# Altium PCB WCH_hairDrierCore_V1.5.PcbDoc (part 5 of 7)
Units mil, origin at the board's own origin, x right, y up, seen from the top; angles counter-clockwise.
Board outline 1683.54 x 992.13 mil, 4 copper layers (Top Layer, Mid-Layer 1, Mid-Layer 2, Bottom Layer); 84 components, 65 nets, 249 pads, 160 vias.
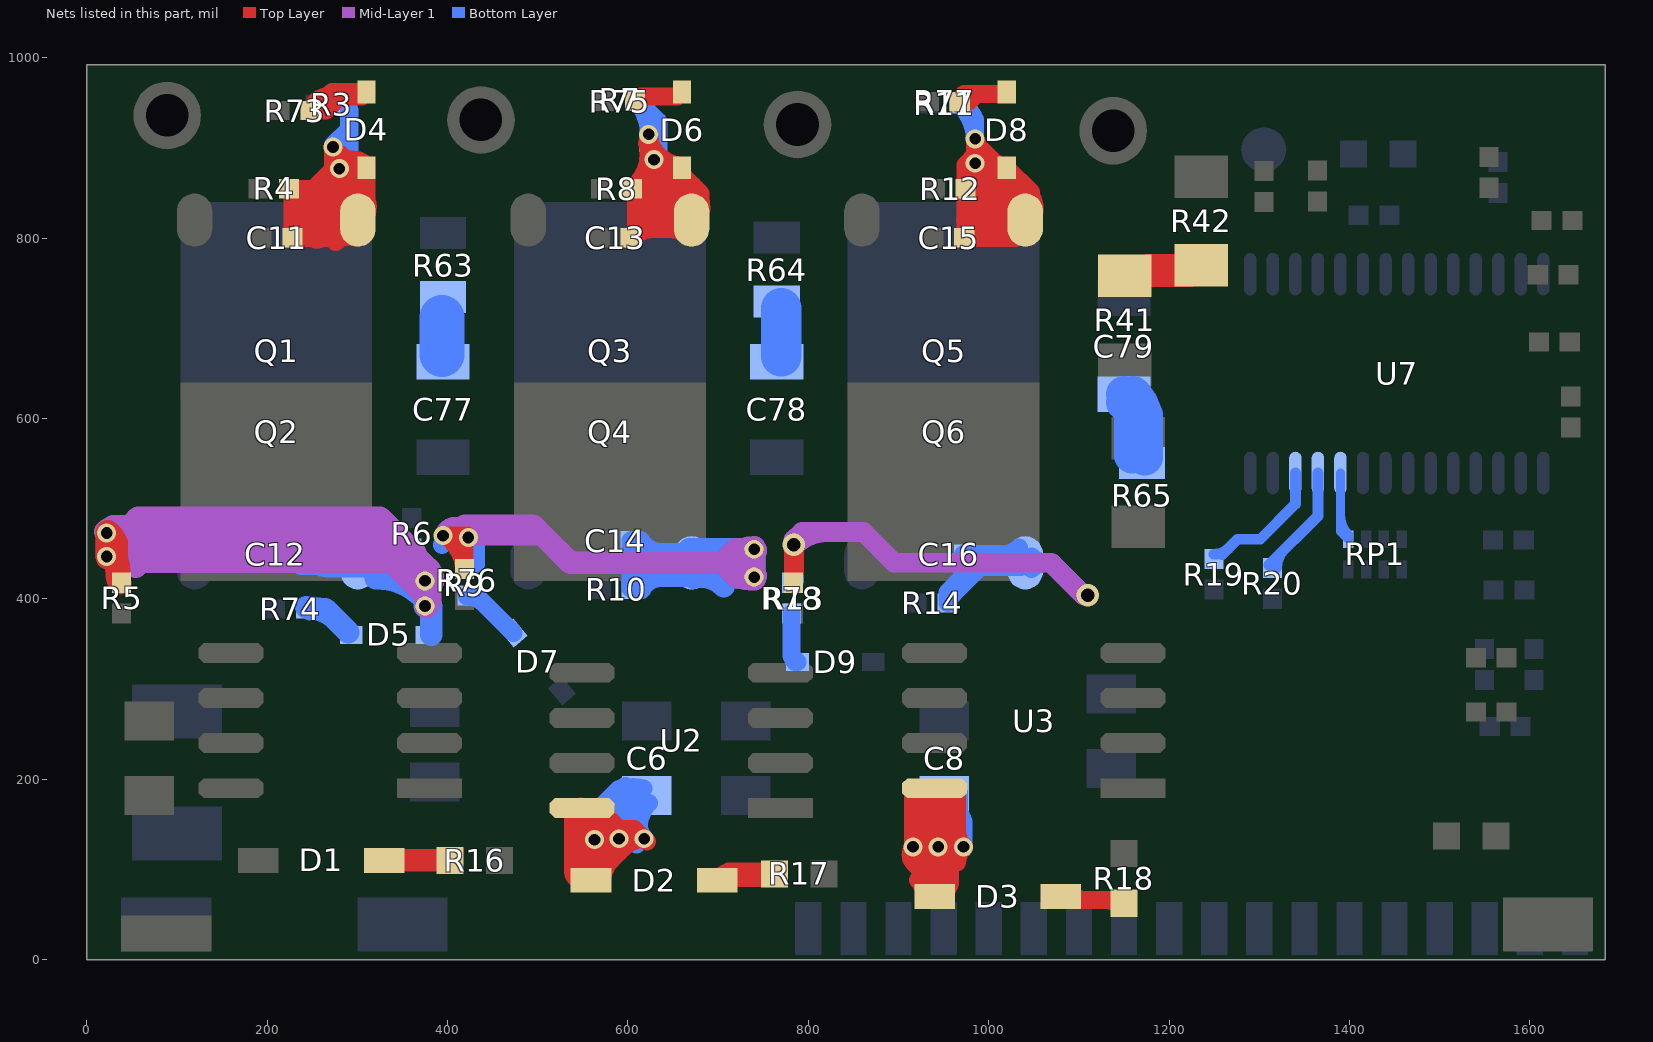
[diagram p7: the nets of this part, all layers, seen from the top]

## Via types
v1: diameter 21, hole 13, Top Layer to Bottom Layer, tented both sides, 155 vias
v2: diameter 25, hole 15, Top Layer to Bottom Layer, tented both sides, 5 vias

## Nets (pads, with @x,y where several pads share a name; then routed paths per layer and width w, separated by ;. In a path a pad name is that pad's centre, name@x,y a point inside that pad or via, vN(x,y) a via of type N, cw(c..) or ccw(c..) an arc to the next point about the centre after c; other vN are vias at no path point) (continued)
NetC6_1: C6.1 D2.2 U2.8 | length 3574.9
  Top Layer w20: v1@558,134 575,134 ; D2.2@559,88 575,104 ; v1@612.5,139.5 v1@610.5,139.5 ; U2.8@547.3,169.7 cw(c510.59,133) v1@562.5,133 ; U2.8@547.3,169.7 cw(c510.59,133) v1@562.5,133 ; U2.8@547.3,169.7 cw(c510.59,133) v1@562.5,133 ; v1@562.65,132.65 cw(c532.82,102.82) 575,102.82 ; v1@562.65,132.65 cw(c532.82,102.82) 575,102.82 ; v1@562.65,132.65 cw(c532.82,102.82) 575,102.82 ; D2.2@565.05,90.67 ccw(c541.02,114.7) 575,114.7 ; D2.2@565.05,90.67 ccw(c541.02,114.7) 575,114.7 ; D2.2@565.05,90.67 ccw(c541.02,114.7) 575,114.7 ; D2.2@566.38,91.54 ccw(c561.68,104) 575,104 ; D2.2@566.38,91.54 ccw(c561.68,104) 575,104 ; D2.2@566.38,91.54 ccw(c561.68,104) 575,104 ; D2.2@571.33,89.12 cw(c585.47,93.52) 575,104 ; D2.2@571.33,89.12 cw(c585.47,93.52) 575,104 ; D2.2@571.33,89.12 cw(c585.47,93.52) 575,104 ; D2.2@571.33,89.12 cw(c585.47,93.52) 575,104 ; D2.2@571.33,89.12 cw(c585.47,93.52) 575,104 ; D2.2@571.33,89.12 cw(c585.47,93.52) 575,104 ; D2.2@571.5,88 cw(c601.68,88) 580.34,109.34 ; D2.2@571.5,88 cw(c601.68,88) 580.34,109.34 ; D2.2@571.5,88 cw(c601.68,88) 580.34,109.34 ; D2.2@575,100.46 cw(c618.54,100.46) v1@590.32,133.62 ; D2.2@575,100.46 cw(c618.54,100.46) v1@590.32,133.62 ; D2.2@575,100.46 cw(c618.54,100.46) v1@590.32,133.62 ; 575,104 590,119 ; 575,104 575,134 ; 575,134 575,142 U2.8@549,168 567,168 590,145 ; 575,134 v1(590,134) ; U2.8@575,168 ccw(c594.31,168) 580.66,154.34 ; U2.8@575,168 ccw(c594.31,168) 580.66,154.34 ; U2.8@575,168 ccw(c594.31,168) 580.66,154.34 ; 577.2,139.8 ccw(c590,152.61) v1@590,134.5 ; 577.2,139.8 ccw(c590,152.61) v1@590,134.5 ; 577.2,139.8 ccw(c590,152.61) v1@590,134.5 ; 578.5,138.5 ccw(c588.38,148.38) v1@589.94,134.5 ; 578.5,138.5 ccw(c588.38,148.38) v1@589.94,134.5 ; 578.5,138.5 ccw(c588.38,148.38) v1@589.94,134.5 ; 581.37,153.63 cw(c561.74,134) v1@589.5,134 ; 581.37,153.63 cw(c561.74,134) v1@589.5,134 ; 581.37,153.63 cw(c561.74,134) v1@589.5,134 ; 582.5,111.5 ccw(c564.6,129.4) v1@589.51,133.91 ; 582.5,111.5 ccw(c564.6,129.4) v1@589.51,133.91 ; 582.5,111.5 ccw(c564.6,129.4) v1@589.51,133.91 ; 590,119 v1@610.5,139.5 ; 590,119 v1(590,134) ; v1(590,134) v1(618,134) 607,145 ; v1(590,134) 590,145 ; 590,145 607,145 ; v1@590.15,134.48 ccw(c596.17,153.83) v1@610.5,139.5 ; v1@590.15,134.48 ccw(c596.17,153.83) v1@610.5,139.5 ; v1@590.15,134.48 ccw(c596.17,153.83) v1@610.5,139.5 ; 590.24,145 cw(c590.24,106.24) v1@617.65,133.65 ; 590.24,145 cw(c590.24,106.24) v1@617.65,133.65 ; 590.24,145 cw(c590.24,106.24) v1@617.65,133.65 ; v1@590.29,133.59 cw(c604.11,114.11) v1@621,131 ; v1@590.29,133.59 cw(c604.11,114.11) v1@621,131 ; v1@590.29,133.59 cw(c604.11,114.11) v1@621,131 ; v1@590.46,133.81 cw(c607,127.19) 607,145 ; v1@590.46,133.81 cw(c607,127.19) 607,145 ; v1@590.46,133.81 cw(c607,127.19) 607,145 ; 594.95,123.95 cw(c618,100.91) v1@618,133.5 ; 594.95,123.95 cw(c618,100.91) v1@618,133.5 ; 594.95,123.95 cw(c618,100.91) v1@618,133.5
  Top Layer w40: D2.2@549,98 549,125 U2.8@549,157 ; 549,122.14 cw(c573.86,122.14) v1@556.28,139.72 ; 549,122.14 cw(c573.86,122.14) v1@556.28,139.72 ; 549,122.14 cw(c573.86,122.14) v1@556.28,139.72 ; 549,122.14 cw(c573.86,122.14) v1@556.28,139.72 ; 549,122.14 cw(c573.86,122.14) v1@556.28,139.72 ; 549,122.14 cw(c573.86,122.14) v1@556.28,139.72 ; 549,122.14 cw(c573.86,122.14) v1@556.28,139.72 ; 549,122.14 cw(c573.86,122.14) v1@556.28,139.72 ; 549,122.14 cw(c573.86,122.14) v1@556.28,139.72 ; 549,143.86 ccw(c573.86,143.86) v1@556.28,126.28 ; 549,143.86 ccw(c573.86,143.86) v1@556.28,126.28 ; 549,143.86 ccw(c573.86,143.86) v1@556.28,126.28
  Bottom Layer w20: v1(563,133) 564,134 v1(590,134) ; 574,144 574,173 ; 581.71,180.71 cw(c607.04,155.38) C6.1@617.21,189.73 ; v1@589.5,128.13 cw(c635.16,128.13) C6.1@618.97,170.83 ; 589.5,157.1 cw(c624.18,157.1) C6.1@611.88,189.53 ; 589.5,169 589.5,159.5 ; 589.63,159.63 cw(c614.84,134.41) C6.1@614.84,170.07 ; 590,189 574,173 ; v1@597,136.35 cw(c635,136.35) C6.1@619.57,171.07 ; C6.1@597,167.12 cw(c621.33,167.12) C6.1@611.45,189.35 ; C6.1@597.15,167.15 ccw(c582.58,181.72) C6.1@603.19,181.72 ; 603,134 597,140 C6.1@597,192.5 ; 612,146.73 cw(c649.84,146.73) C6.1@623.08,173.48 ; v1(618,134) 612,140 612,177.5 C6.1@597,192.5 ; v1@562.65,133.35 ccw(c535.24,160.76) 574,160.76 ; v1@562.65,133.35 ccw(c535.24,160.76) 574,160.76 ; v1@562.65,133.35 ccw(c535.24,160.76) 574,160.76 ; 574,173 ccw(c627.84,173) v1@590.35,134.36 ; 574,173 ccw(c627.84,173) v1@590.35,134.36 ; 574,173 ccw(c627.84,173) v1@590.35,134.36 ; 589.5,159.5 597,167 C6.1@597,192.5 ; 589.5,159.5 589.5,185 589.5,159.5 ; 589.5,159.5 589.5,134.5 v1(590,134) ; 589.5,159.5 562,132 574,134 614,134 v1(590,134) ; 589.5,162.32 cw(c627.18,162.32) C6.1@600.54,188.96 ; 589.5,162.32 cw(c627.18,162.32) C6.1@600.54,188.96 ; 589.5,162.32 cw(c627.18,162.32) C6.1@600.54,188.96 ; 589.5,162.32 cw(c627.18,162.32) C6.1@600.54,188.96 ; 589.5,162.32 cw(c627.18,162.32) C6.1@600.54,188.96 ; 589.5,162.32 cw(c627.18,162.32) C6.1@600.54,188.96 ; v1@589.65,134.35 ccw(c571.89,152.11) 597,152.11 ; v1@589.65,134.35 ccw(c571.89,152.11) 597,152.11 ; v1@589.65,134.35 ccw(c571.89,152.11) 597,152.11 ; v1@590.09,133.51 cw(c594.1,112.1) 609.5,127.5 ; v1@590.09,133.51 cw(c594.1,112.1) 609.5,127.5 ; v1@590.09,133.51 cw(c594.1,112.1) 609.5,127.5 ; 612,149.69 ccw(c633.69,149.69) v1@618.35,134.35 ; 612,149.69 ccw(c633.69,149.69) v1@618.35,134.35 ; 612,149.69 ccw(c633.69,149.69) v1@618.35,134.35 ; 574,138.82 cw(c634.45,138.82) 599.86,188.4 ccw(c634.45,138.82) 574,138.82 ; 574,162.35 cw(c599.24,162.35) 597.37,187.51 ccw(c599.24,162.35) 574,162.35 ; 582.49,181.49 cw(c597,166.98) 597,187.5 ccw(c597,166.98) 582.49,181.49 ; 589.5,167.83 cw(c615.09,167.83) 599.96,188.47 ccw(c615.09,167.83) 589.5,167.83 ; C6.1@593.46,188.96 cw(c548.72,144.22) 612,144.22 ccw(c548.72,144.22) C6.1@593.46,188.96
NetC8_1: C8.1 D3.2 U3.8 | length 3968.5
  Top Layer w20: U3.8@916,188 916,108 926,98 ; 926,108 926,112 ; U3.8@926,188 926,112 ; U3.8@940,190 940,110 940,85 941,84 ; U3.8@957,190 957,110 957,87 ; 965,109 U3.8@965,189 ; U3.8@914.29,189.29 cw(c886.03,161.03) 926,161.03 ; U3.8@914.29,189.29 cw(c886.03,161.03) 926,161.03 ; U3.8@914.29,189.29 cw(c886.03,161.03) 926,161.03 ; v1@915.65,124.65 cw(c890.65,99.65) 926,99.65 ; v1@915.65,124.65 cw(c890.65,99.65) 926,99.65 ; v1@915.65,124.65 cw(c890.65,99.65) 926,99.65 ; v1@915.65,125.35 ccw(c890.65,150.35) 926,150.35 ; v1@915.65,125.35 ccw(c890.65,150.35) 926,150.35 ; v1@915.65,125.35 ccw(c890.65,150.35) 926,150.35 ; v1@915.72,124.59 cw(c902.73,105.28) 926,105.28 ; v1@915.72,124.59 cw(c902.73,105.28) 926,105.28 ; v1@915.72,124.59 cw(c902.73,105.28) 926,105.28 ; v1@915.79,124.55 cw(c908.44,108.6) 926,108.6 ; v1@915.79,124.55 cw(c908.44,108.6) 926,108.6 ; v1@915.79,124.55 cw(c908.44,108.6) 926,108.6 ; v1@915.79,124.55 cw(c908.44,108.6) 926,108.6 ; v1@915.79,124.55 cw(c908.44,108.6) 926,108.6 ; v1@915.79,124.55 cw(c908.44,108.6) 926,108.6 ; v1@915.79,124.55 cw(c908.44,108.6) 926,108.6 ; v1@915.79,124.55 cw(c908.44,108.6) 926,108.6 ; v1@915.79,124.55 cw(c908.44,108.6) 926,108.6 ; v1@916.39,124.69 ccw(c927.22,116.22) 917.5,106.5 ; v1@916.39,124.69 ccw(c927.22,116.22) 917.5,106.5 ; v1@916.39,124.69 ccw(c927.22,116.22) 917.5,106.5 ; 921.64,88.36 cw(c906.86,73.58) D3.2@927.54,70.55 ; 921.64,88.36 cw(c906.86,73.58) D3.2@927.54,70.55 ; 921.64,88.36 cw(c906.86,73.58) D3.2@927.54,70.55 ; 926,84 ccw(c937.57,84) D3.2@932.83,73.45 ; 926,84 ccw(c937.57,84) D3.2@932.83,73.45 ; 926,84 ccw(c937.57,84) D3.2@932.83,73.45 ; 926,84 926,112 ; 926,84 D3.2@940,70 957,87 ; 926,91.87 ccw(c953.15,91.87) D3.2@933.95,72.67 ; 926,91.87 ccw(c953.15,91.87) D3.2@933.95,72.67 ; 926,91.87 ccw(c953.15,91.87) D3.2@933.95,72.67 ; 926,102.8 cw(c948.07,102.8) v1@944.09,124.51 ; 926,102.8 cw(c948.07,102.8) v1@944.09,124.51 ; 926,102.8 cw(c948.07,102.8) v1@944.09,124.51 ; 926,169.66 ccw(c988.66,169.66) v1@944.35,125.35 ; 926,169.66 ccw(c988.66,169.66) v1@944.35,125.35 ; 926,169.66 ccw(c988.66,169.66) v1@944.35,125.35 ; 940,114.14 cw(c954.86,114.14) v1@944.35,124.65 ; 940,114.14 cw(c954.86,114.14) v1@944.35,124.65 ; 940,114.14 cw(c954.86,114.14) v1@944.35,124.65 ; 940,114.14 cw(c954.86,114.14) v1@944.35,124.65 ; 940,114.14 cw(c954.86,114.14) v1@944.35,124.65 ; 940,114.14 cw(c954.86,114.14) v1@944.35,124.65 ; 940,114.14 cw(c954.86,114.14) v1@944.35,124.65 ; 940,114.14 cw(c954.86,114.14) v1@944.35,124.65 ; 940,114.14 cw(c954.86,114.14) v1@944.35,124.65 ; 940,135.86 ccw(c954.86,135.86) v1@944.35,125.35 ; 940,135.86 ccw(c954.86,135.86) v1@944.35,125.35 ; 940,135.86 ccw(c954.86,135.86) v1@944.35,125.35 ; v1@943.65,124.65 cw(c911.41,92.41) 957,92.41 ; v1@943.65,124.65 cw(c911.41,92.41) 957,92.41 ; v1@943.65,124.65 cw(c911.41,92.41) 957,92.41 ; v1@943.65,125.35 ccw(c911.41,157.59) 957,157.59 ; v1@943.65,125.35 ccw(c911.41,157.59) 957,157.59 ; v1@943.65,125.35 ccw(c911.41,157.59) 957,157.59 ; v1@943.82,124.53 cw(c936.16,105.15) 957,105.15 ; v1@943.82,124.53 cw(c936.16,105.15) 957,105.15 ; v1@943.82,124.53 cw(c936.16,105.15) 957,105.15 ; v1@943.82,124.53 cw(c936.16,105.15) 957,105.15 ; v1@943.82,124.53 cw(c936.16,105.15) 957,105.15 ; v1@943.82,124.53 cw(c936.16,105.15) 957,105.15 ; D3.2@946.05,72.67 ccw(c919.61,99.11) 957,99.11 ; D3.2@946.05,72.67 ccw(c919.61,99.11) 957,99.11 ; D3.2@946.05,72.67 ccw(c919.61,99.11) 957,99.11 ; D3.2@947.47,73.57 ccw(c942.77,87) 957,87 ; D3.2@947.47,73.57 ccw(c942.77,87) 957,87 ; D3.2@947.47,73.57 ccw(c942.77,87) 957,87 ; D3.2@952.4,70.86 cw(c969.2,74.8) 957,87 ; D3.2@952.4,70.86 cw(c969.2,74.8) 957,87 ; D3.2@952.4,70.86 cw(c969.2,74.8) 957,87 ; 957,103.79 cw(c978.77,103.79) v1@972.15,124.52 ; 957,103.79 cw(c978.77,103.79) v1@972.15,124.52 ; 957,103.79 cw(c978.77,103.79) v1@972.15,124.52 ; 957,162.42 ccw(c1009.42,162.42) v1@972.35,125.35 ; 957,162.42 ccw(c1009.42,162.42) v1@972.35,125.35 ; 957,162.42 ccw(c1009.42,162.42) v1@972.35,125.35 ; 957,168.27 cw(c986.73,168.27) U3.8@965.71,189.29 ; 957,168.27 cw(c986.73,168.27) U3.8@965.71,189.29 ; 957,168.27 cw(c986.73,168.27) U3.8@965.71,189.29 ; 965,107.54 cw(c988.58,107.54) v1@972.34,124.64 ; 965,107.54 cw(c988.58,107.54) v1@972.34,124.64 ; 965,107.54 cw(c988.58,107.54) v1@972.34,124.64 ; 965,143.11 ccw(c990.11,143.11) v1@972.35,125.35 ; 965,143.11 ccw(c990.11,143.11) v1@972.35,125.35 ; 965,143.11 ccw(c990.11,143.11) v1@972.35,125.35
  Bottom Layer w20: v1(916,125) v1(972,125) 972,153 ; v1@919,119.39 cw(c977.9,119.39) C8.1@950.3,171.43 ; v1@919,125 919,157 C8.1@947,185 ; 919,152.64 cw(c960.27,152.64) C8.1@940.93,189.1 ; v1@921,133 940,133 940,153 942,155 ; 923.04,161.04 cw(c944.84,139.24) C8.1@944.84,170.07 ; 923.12,161.88 ccw(c944.13,182.88) 959.71,157.59 ; C8.1@925.74,163.74 ccw(c907.75,181.72) C8.1@933.19,181.72 ; 930,155 940,145 ; 940,141.9 cw(c984.67,141.9) C8.1@953.08,173.48 ; 940,152.6 cw(c962.31,152.6) C8.1@950.84,171.73 ; 947,160 942,155 ; C8.1@947,187 947,178 970,155 ; C8.1@947,188 966,169 966,159 970,155 ; C8.1@949.06,172.88 cw(c906.21,122.96) v1@972,122.96 ; C8.1@954.49,170.27 cw(c950.51,149.16) 972,149.16 ; 956,127 956,155 ; 956,152.01 cw(c986.37,152.01) C8.1@964.89,173.48 ; C8.1@964.23,172.87 ccw(c979.53,154.99) 956,154.99 ; C8.1@967,184.5 967,158 970,155 ; v1@916.35,124.65 cw(c936.52,104.48) 936.52,133 ; v1@916.35,124.65 cw(c936.52,104.48) 936.52,133 ; v1@916.35,124.65 cw(c936.52,104.48) 936.52,133 ; 923.48,133 cw(c923.48,104.48) v1@943.65,124.65 ; 923.48,133 cw(c923.48,104.48) v1@943.65,124.65 ; 923.48,133 cw(c923.48,104.48) v1@943.65,124.65 ; 931.83,153.17 cw(c903.67,125) v1@943.5,125 ; 931.83,153.17 cw(c903.67,125) v1@943.5,125 ; 931.83,153.17 cw(c903.67,125) v1@943.5,125 ; 932,153 cw(c904.24,125.24) v1@943.5,125 ; 932,153 cw(c904.24,125.24) v1@943.5,125 ; 932,153 cw(c904.24,125.24) v1@943.5,125 ; 940,135.86 ccw(c954.86,135.86) v1@944.35,125.35 ; 940,135.86 ccw(c954.86,135.86) v1@944.35,125.35 ; 940,135.86 ccw(c954.86,135.86) v1@944.35,125.35 ; 942,155 970,155 ; v1@943.65,125.36 ccw(c914.25,155) 956,155 ; v1@943.65,125.36 ccw(c914.25,155) 956,155 ; v1@943.65,125.36 ccw(c914.25,155) 956,155 ; 956,155 ccw(c991.02,155) v1@972.27,125.42 ; 956,155 ccw(c991.02,155) v1@972.27,125.42 ; 956,155 ccw(c991.02,155) v1@972.27,125.42 ; C8.1@948.41,173.48 cw(c930.1,155.17) 956,155.17 ccw(c930.1,155.17) C8.1@948.41,173.48
  other v1: 944,125
NetC11_1: C11.1 D4.1 Q1.1 R3.1 R4.2 | length 2649.4
  Top Layer w20: R4.2@224.22,854.63 242,854.63 ; R4.2@224.27,854.18 cw(c181.48,811.39) 242,811.39 ; C11.1@227.86,800.37 280.92,800.37 Q1.1@300.55,820 ; C11.1@227.92,800.82 ccw(c193.94,834.8) 242,834.8 ; C11.1@228,805 R4.2@228,855.61 ; 242,801.37 242,854.63 ; 247.92,800.82 ccw(c232.74,816) 254.21,816 ; 248.06,800.92 ccw(c242.19,811.41) 254.21,811.41 254.22,826 ; 248.37,801 ccw(c248.37,834.8) 272.27,810.9 ; 248.76,800.86 ccw(c255.45,809.18) 263,801.63 276,814.63 ; 248.9,800.02 cw(c276,782.18) 276,814.63 ; 248.99,800.28 cw(c265.58,797.86) 265.58,814.63 276,814.63 ; 253.54,800.37 ccw(c253.54,857.17) Q1.1@293.7,817.01 ; 254.51,855.22 ccw(c244.46,883) v1@274,883 ; 255.17,854.18 cw(c278.86,830.49) 278.86,864 ; 255.17,855.08 ccw(c284.32,884.23) 284.32,843 ; 255.23,854.27 cw(c274,841.05) 274,864 ; 255.29,854.9 ccw(c274,863.66) 274,843 ; 259.8,804.38 ccw(c276.58,854.13) Q1.1@304.12,809.43 ; 261.49,800.12 cw(c279.43,782.18) Q1.1@294.72,802.43 ; 266.37,814.63 cw(c266.37,775.98) Q1.1@293.7,803.31 ; 267.89,826 ccw(c267.89,862.5) 293.7,836.69 ccw(c254.36,876.04) D4.1@310,876.04 ; 269.07,847.93 ccw(c291.67,870.53) Q1.1@298.49,839.3 ; 271.18,837.66 254.22,854.63 ; v1@272.65,900.65 cw(c256.1,884.1) v1@279.5,884.1 ; v1(273,901) v1@273,884 ; 273.35,811.98 cw(c295.41,789.93) Q1.1@303.09,820.15 ; v1@273.46,901.2 ccw(c295,910.44) 295,887 ; 276,795.45 cw(c291.41,780.04) Q1.1@297.74,800.89 ; 277.22,862.78 cw(c244.29,829.84) Q1.1@290.87,829.84 ; 277.74,816.37 cw(c293.41,800.7) Q1.1@306.77,818.39 ; v1@279.5,877 279.5,894.5 287,887 ; v1@280.3,876.6 cw(c292.67,859.68) D4.1@307.5,874.5 ; v1@280.47,876.83 cw(c295,871.54) 295,887 ; Q1.1@291,814.63 276,814.63 ; Q1.1@291,826 274,843 ; Q1.1@292.36,835.02 cw(c276,845.36) 276,826 254.22,826 ; 294.31,887 cw(c294.31,864.81) 310,880.5 ccw(c295,866.44) 295,887 ; Q1.1@297,843 280,860 v1(280,877) 309,877 D4.1@310,878 310,847 293,864 ; 297,877 287,887 ; 299.35,857.65 cw(c271.53,829.84) Q1.1@310.87,829.84 ; 303.67,853.33 cw(c284.74,834.4) Q1.1@310.46,826.99 ; D4.1@305,877 295,887 ; 242,854.63 262.37,854.63 ; 254.22,826 254.22,854.63 ; 254.22,854.63 262.37,854.63 ; 254.22,854.63 254.22,857.21 273,876 v1@273,884 ; 254.72,854 cw(c254.72,834.01) 268.85,848.15 ; 254.72,854 cw(c254.72,834.01) 268.85,848.15 ; 254.72,854 cw(c254.72,834.01) 268.85,848.15 ; 254.72,854 cw(c254.72,834.01) 268.85,848.15 ; 254.72,854 cw(c254.72,834.01) 268.85,848.15 ; 262.37,854.63 274,843 ; v1@273,884 v1@274,883 ; 274,843 276,841 276,814.63 ; 274,843 274,864 ; 274,862.68 cw(c292.52,862.68) v1@280.33,876.62 ; 274,862.68 cw(c292.52,862.68) v1@280.33,876.62 ; 274,862.68 cw(c292.52,862.68) v1@280.33,876.62 ; 274,862.68 cw(c292.52,862.68) v1@280.33,876.62 ; 274,864 v1@274,883 ; 274,864 293,864 ; 276,814.63 cw(c276,795.95) 292.17,805.31 ccw(c276,795.95) 276,814.63 ; 287,887 295,887 ; 293,864 ccw(c293,882.31) D4.1@310,875.5 ; 293,864 ccw(c293,882.31) D4.1@310,875.5 ; D4.1@310,875.5 cw(c282.24,903.26) 282.24,864 ccw(c282.24,903.26) D4.1@310,875.5 ; 268.9,871.9 cw(c280,860.81) 280,876.5 ccw(c280,860.81) 268.9,871.9 ; v1@273,895.11 ccw(c298.11,895.11) 280.35,877.35 cw(c298.11,895.11) v1@273,895.11 ; 274,861.31 cw(c295.69,861.31) 280.35,876.65 ccw(c295.69,861.31) 274,861.31 ; v1@280.49,876.91 ccw(c308.89,871.89) 288.5,851.5 cw(c308.89,871.89) v1@280.49,876.91
  Bottom Layer w20: v1(280,877) 273,884 273,903 291,921 ; R3.1@291,941.77 291,921 ; v1@279.65,877.35 ccw(c261.89,895.11) 287,895.11 cw(c261.89,895.11) v1@279.65,877.35 ; v1@279.65,877.35 ccw(c252.24,904.76) 291,904.76 cw(c252.24,904.76) v1@279.65,877.35 ; 287,902 cw(c279.82,909.18) 273.32,901.38 ccw(c279.82,909.18) 287,902 ; 287,902 287,883 291,887 291,906 ; 287,902 291,906 ; 291,906 cw(c278.28,918.72) 273.14,901.48 ccw(c278.28,918.72) 291,906 ; 291,906 291,921 ; 291,921 cw(c271.44,921) 272.96,901.5 ccw(c271.44,921) 291,921 ; v1@272.79,900.55 cw(c262.32,878.2) 287,878.2 ccw(c262.32,878.2) v1@272.79,900.55 ; v1@272.9,900.51 cw(c268.2,878.2) 291,878.2 ccw(c268.2,878.2) v1@272.9,900.51 ; v1@273,895.11 ccw(c298.11,895.11) 280.35,877.35 cw(c298.11,895.11) v1@273,895.11
NetC12_1: C12.1 D5.1 Q2.1 R5.1 R6.2 | length 4110.3
  Top Layer w25: v1(22,447) v1(22,473) 33,462 ; v1@22.41,462.8 cw(c-10.38,430) 36,430 ; v1@22.94,445.24 ccw(c14,462) 33,462 ; v1@23,474.73 cw(c13.06,457.44) 33,457.44 ; v1@23.13,448.65 cw(c10.39,429.97) 33,429.97 ; v1@23.41,474.41 cw(c0.27,451.27) 33,451.27 ; 33,434 33,462 ; R5.1@33,427.45 ccw(c47.71,427.45) 37.31,417.05 cw(c47.71,427.45) R5.1@33,427.45
  Mid-Layer 1 w25: v1@20.59,474.41 cw(c35.21,459.79) 35.21,480.47 ; v1@22.04,471 ccw(c21.32,511.82) 50.69,483.46 ; 47.47,480.47 29.47,480.47 v1(22,473) v1(22,447) ; 55.01,459.78 ccw(c76,462.12) 76,441 ; 55.45,458.74 cw(c72.99,473.01) 57,489 ; 55.59,488.59 ccw(c85.97,518.97) 85.97,476 ; 57,460 76,441 ; 63.5,453.5 197.5,453.5 ; 214,453.5 177.5,490 ; 351.1,427.9 ccw(c375,451.8) v1@375,418 ; 364,451 325,490 177.5,490 ; 366,441 357,441 ; 366.39,445.61 cw(c340.79,420) v1@377,420 ; 369.93,409.07 cw(c352.86,392) v1@377,392 ; v1@376.41,390.59 ccw(c365.34,401.66) 381,401.66 ; v1@376.41,418.59 ccw(c365.34,429.66) 381,429.66 ; v1@376.41,421.41 cw(c365.34,410.34) 381,410.34 ; 380,432 381,431 ; v1(22,447) 43,447 ; v1(22,447) 43,447 ; v1@22,449 cw(c22,403.13) 54.44,435.56 ; v1@22,449 cw(c22,403.13) 54.44,435.56 ; v1@22,449 cw(c22,403.13) 54.44,435.56 ; 43,447 49,441 ; 43,447 49,441 ; 49,441 76,441 ; 49,441 29,461 57,490 ; 57,490 57,476 175,476 ; 57,490 177.5,490 ; 76,441 210,441 ; 175,476 186.5,464.5 197.5,453.5 ; 175,476 336,476 364,448 ; 197.5,453.5 210,441 ; 197.5,453.5 350.5,453.5 356,459 338,441 ; 210,441 321,441 ; 321,441 338,441 ; 321,441 344,441 357,441 ; 338,441 381,398 381,431 ; 357,441 367,431 ; 357,441 364,448 ; 364,448 381,431 ; 367,431 cw(c367,412) 383.76,420.94 ccw(c367,412) 367,431 ; 367,431 381,431 ; 378.34,433.66 cw(c364.69,420) v1@384,420 ; 378.34,433.66 cw(c364.69,420) v1@384,420 ; 378.34,433.66 cw(c364.69,420) v1@384,420 ; 378.34,433.66 cw(c364.69,420) v1@384,420 ; 378.34,433.66 cw(c364.69,420) v1@384,420 ; 378.34,433.66 cw(c364.69,420) v1@384,420 ; v1@21.94,449 cw(c23.28,406.28) 53.5,436.5 ccw(c23.28,406.28) v1@21.94,449 ; 55.59,458.59 ccw(c67.86,470.86) 67.86,453.5 cw(c67.86,470.86) 55.59,458.59 ; 55.59,461.41 cw(c90.8,426.2) 90.8,476 ccw(c90.8,426.2) 55.59,461.41 ; 348.5,430.5 ccw(c378.95,460.95) 382.15,418.01 cw(c378.95,460.95) 348.5,430.5 ; 349.5,429.5 ccw(c377.82,457.82) 382.22,418.01 cw(c377.82,457.82) 349.5,429.5
  Bottom Layer w20: C12.1@226.82,450.08 ccw(c259.9,483.16) 259.9,436.37 ; 247.86,449.63 Q2.1@310.92,449.63 ; 255,436.37 268,436.37 ; 268.41,436.37 ccw(c268.41,472.15) Q2.1@293.7,446.85 ; 276.66,449.63 ccw(c276.66,473.74) Q2.1@293.7,456.69 ; 277.68,449.63 cw(c277.68,426.97) Q2.1@293.7,442.99 ; Q2.1@311.18,436.37 268,436.37 ; 248.96,449.84 ccw(c268,456.55) 268,436.37 ; 248.96,449.84 ccw(c268,456.55) 268,436.37 ; 248.96,449.84 ccw(c268,456.55) 268,436.37 ; 248.96,449.84 ccw(c268,456.55) 268,436.37 ; 268,436.37 237.63,436.37 225.86,448.13 C12.1@225.86,449.63 245,449.63 254.74,449.63 268,436.37 ; 248.37,449 cw(c248.37,432.1) 260.32,444.05 ccw(c248.37,432.1) 248.37,449 ; 248.82,450.08 ccw(c281.9,483.16) 281.9,436.37 cw(c281.9,483.16) 248.82,450.08 ; Q2.1@288.41,436.37 ccw(c288.41,472.15) 313.7,446.85 cw(c288.41,472.15) Q2.1@288.41,436.37 ; Q2.1@296.66,449.63 ccw(c296.66,473.74) 313.7,456.69 cw(c296.66,473.74) Q2.1@296.66,449.63 ; Q2.1@297.68,449.63 cw(c297.68,426.97) 313.7,442.99 ccw(c297.68,426.97) Q2.1@297.68,449.63
  Bottom Layer w25: 246.75,448.7 ccw(c268,460.85) 268,436.37 Q2.1@311.18,436.37 ; 247.05,448.31 ccw(c275.87,477.13) 275.87,436.37 ; 274.44,436.37 ccw(c274.44,466.11) Q2.1@295.47,445.08 ; Q2.1@294.44,436.37 ccw(c294.44,466.11) Q2.1@315.47,445.08 ; Q2.1@296.91,447.6 cw(c302.04,423.04) Q2.1@319.77,440.78 ; Q2.1@314.55,434 328.55,448 ; 320.55,422.97 cw(c320.55,349.4) v1@372.58,401.42 ; 322.11,423.14 cw(c331.65,380.36) 362.64,411.36 ; 326.09,434.73 ccw(c351,455.3) 351,423 ; 328,440 ccw(c328,487.65) R6.2@361.69,453.96 ; R6.2@358.57,455.77 ccw(c383.33,448.98) 365.17,430.83 ; 360.37,444.37 R6.2@360.37,451 ; v1(375,392) 375,421 356,440 320.55,440 337.55,423 351,423 ; v1@376.41,393.41 cw(c362.93,379.93) 382,379.93 ; D5.1@382,360 382,391 382,392 351,423 ; 325.63,454.92 ccw(c342.35,471.64) 342.35,448 cw(c342.35,471.64) 325.63,454.92
  other v1: 375,420
NetC13_1: C13.1 D6.1 Q3.1 R7.1 R8.2 | length 2046.8
  Top Layer w20: C13.1@602.86,800.37 630.12,827.63 ; C13.1@602.92,800.82 ccw(c588.26,815.48) 609,815.48 ; C13.1@603.82,799.92 cw(c628.14,775.6) 628.14,810 ; R8.2@604.27,854.18 cw(c592.87,842.78) 609,842.78 ; R8.2@604.34,855.13 ccw(c575.25,893) v1@623,893 ; R8.2@604.55,854.02 cw(c597.04,827.09) 625,827.09 ; 608.82,819.92 cw(c620.18,808.56) 620.18,824.63 ; C13.1@609,801.51 C13.1@609,810 ; R8.2@609,854.41 609,824.63 ; R8.2@609.27,855.08 ccw(c576.14,888.21) v1@623,888.21 ; R8.2@609.47,854.05 cw(c599.43,830.54) 625,830.54 ; R8.2@609.68,855.26 ccw(c608.21,876) 629,876 ; 623,856.63 v1@623,893 ; v1(623,915) 623,903 ; 625,836 625,854.63 ; 629,858.63 629,876 ; 635.99,824.63 cw(c635.99,785.44) Q3.1@663.7,813.15 ; 641,827.63 641,854.63 ; 645,824.63 Q3.1@667.5,847.13 ; 646.38,826.01 cw(c662.86,809.53) Q3.1@676.66,828.31 ; 646.79,810 ccw(c646.79,833.92) Q3.1@663.7,817.01 ; 647.55,810 cw(c647.55,787.16) Q3.1@663.7,803.31 ; 648,876 648,878 623,903 ; 657.37,854.63 641,854.63 ; D6.1@658,876 629,876 ; Q3.1@660,840.55 D6.1@660,878 ; Q3.1@660,846.14 ccw(c688.41,846.14) Q3.1@676.07,820.55 ; Q3.1@670.55,810 C13.1@609,810 ; 671.43,858.57 cw(c647.46,834.61) Q3.1@680.65,827.76 ; Q3.1@675.92,824.63 609,824.63 ; Q3.1@677.33,836.76 cw(c717.73,878) D6.1@660,878 ; Q3.1@680.55,820 680.55,849.45 660,870 D6.1@660,878 ; C13.1@609,810 609,824.63 ; v1@623,893 623,903 ; v1@623,893 v1(629,887) v1@629,877 ; 623,902.69 ccw(c644.69,902.69) v1@629.35,887.35 ; 623,902.69 ccw(c644.69,902.69) v1@629.35,887.35 ; 623,902.69 ccw(c644.69,902.69) v1@629.35,887.35 ; 623,902.69 ccw(c644.69,902.69) v1@629.35,887.35 ; 623,902.69 ccw(c644.69,902.69) v1@629.35,887.35 ; 623,902.69 ccw(c644.69,902.69) v1@629.35,887.35 ; 625,854.63 609.22,854.63 609.22,857.21 v1@629,877 ; 625,854.63 641,854.63 ; v1@628.5,887 ccw(c603.15,887) 621.08,904.92 cw(c603.15,887) v1@628.5,887 ; v1@628.5,887 cw(c603.15,887) 621.08,869.08 ccw(c603.15,887) v1@628.5,887 ; 629,876 v1@629,877 ; v1@629.35,887.35 ccw(c656.76,914.76) 656.76,876 cw(c656.76,914.76) v1@629.35,887.35 ; 641,854.63 641,859 D6.1@660,878 ; 623,871.31 cw(c644.69,871.31) 629.35,886.65 ccw(c644.69,871.31) 623,871.31 ; v1@623.5,915 ccw(c653.68,915) 632.34,893.66 cw(c653.68,915) v1@623.5,915 ; v1@629,886.5 cw(c629,861.15) 646.92,879.08 ccw(c629,861.15) v1@629,886.5 ; v1@635.25,890.75 ccw(c660,915.51) 660,880.5 cw(c660,915.51) v1@635.25,890.75 ; 645.99,824.63 cw(c645.99,785.44) 673.7,813.15 ccw(c645.99,785.44) 645.99,824.63 ; D6.1@660,875.5 ccw(c673.28,875.5) 663.89,866.11 cw(c673.28,875.5) D6.1@660,875.5
  Bottom Layer w20: R7.1@607.86,953.63 609.37,953.63 623,940 ; 623,897 623,940 ; v1(629,887) 634,892 634,929 ; 623,940 634,929 ; 634,929 cw(c620.23,929) 622.9,915.49 ccw(c620.23,929) 634,929 ; R7.1@607.92,953.18 cw(c571.53,916.79) 623,916.79 ccw(c571.53,916.79) R7.1@607.92,953.18 ; R7.1@608.2,953.02 cw(c602.9,933.64) 623,933.64 ccw(c602.9,933.64) R7.1@608.2,953.02 ; v1@622.67,914.63 cw(c600.49,889.51) 634,889.51 ccw(c600.49,889.51) v1@622.67,914.63 ; 623,902.69 ccw(c644.69,902.69) 629.35,887.35 cw(c644.69,902.69) 623,902.69 ; v1@628.65,887.35 ccw(c615.72,900.28) 634,900.28 cw(c615.72,900.28) v1@628.65,887.35
NetC14_1: C14.1 Q4.1 R9.1 R10.2 R76.1 | length 3924.2
  Top Layer w20: 406.24,461.76 cw(c377.85,433.37) R9.1@418,433.37 ; v1@418.32,461.11 cw(c430.89,461.11) 422,470 398,470 418.63,449.37 418.63,448 ; R9.1@418.63,432.87 v1@418.63,461.11
  Mid-Layer 1 w20: v1@395.39,469.69 cw(c419,450.71) 419,481 ; v1@395.49,469.9 cw(c409,467.23) 409,481 ; v1@397,469 cw(c411.93,454.07) v1@423.72,471.59 ; v1@398,470 409,481 ; v1@418,469 507,469 495,481 419,481 ; v1@423.55,471.79 ccw(c409,464.91) 409,481 ; v1@424.35,471.65 cw(c446.93,449.07) 446.93,481 ; 409,481 419,481 ; v1@413.35,468.65 cw(c443.18,438.82) 443.18,481 ccw(c443.18,438.82) v1@413.35,468.65
  Mid-Layer 1 w25: 419,481 495,481 507,469 536,440 734,440 ; v1@422.59,473.41 cw(c440.9,455.1) 440.9,481 ; 706.2,440 cw(c706.2,390.2) v1@741.41,425.41 ; 706.2,440 cw(c706.2,390.2) v1@741.41,425.41 ; 706.2,440 cw(c706.2,390.2) v1@741.41,425.41 ; 708.62,440 ccw(c708.62,486.38) v1@741.41,453.59 ; 708.62,440 ccw(c708.62,486.38) v1@741.41,453.59 ; 708.62,440 ccw(c708.62,486.38) v1@741.41,453.59 ; 709.27,444.27 cw(c740,413.54) v1@740,457 ; 709.27,444.27 cw(c740,413.54) v1@740,457 ; 709.27,444.27 cw(c740,413.54) v1@740,457 ; 710,445 cw(c739,416) v1@740.05,457 ; 710,445 cw(c739,416) v1@740.05,457 ; 710,445 cw(c739,416) v1@740.05,457 ; 714.5,430.5 ccw(c735.79,451.78) v1@740.3,422.02 ; 714.5,430.5 ccw(c735.79,451.78) v1@740.3,422.02 ; 714.5,430.5 ccw(c735.79,451.78) v1@740.3,422.02 ; 411.59,470.41 cw(c437.14,444.86) 437.14,481 ccw(c437.14,444.86) 411.59,470.41 ; 705,440 720,455 v1(740,455) v1(740,424) 721,424 705,440
  Bottom Layer w20: v1@394,460 cw(c421.9,432.11) v1@423.97,471.5 ; v1@395,469.5 cw(c395,427.25) 424.87,457.13 ; v1@395.06,469.5 cw(c399.13,438.13) v1@421.5,460.5 ; v1@395.11,470.49 ccw(c398.19,484.55) 408.37,474.37 ; v1@398,470 R76.1@421.37,446.63 ; v1@399.37,465.37 cw(c416.75,447.99) v1@423.86,471.52 ; v1@403,469 408.37,474.37 ; 404.55,477.45 cw(c365.48,438.37) 420.74,438.37 ccw(c399.28,438.37) 414.45,453.55 ; v1@412.85,468.52 cw(c404.55,443.02) R76.1@431.37,443.02 ; v1@415,469 413,469 431.37,450.63 ; R76.1@420.92,438.82 ccw(c395.71,464.03) v1@431.37,464.03 ; v1@421.63,460.37 cw(c399.62,438.37) R76.1@430.74,438.37 ; v1@423.65,471.65 cw(c405,453) 431.37,453 ; R76.1@431.37,437.87 431.37,450.63 ; 432,475 431.37,474.37 ; R10.2@602.86,411.72 C14.1@602.86,464.63 ; C14.1@602.92,464.18 cw(c578.93,440.19) 612.87,440.19 ; C14.1@603.37,464 cw(c603.37,439.56) 620.65,456.84 ; C14.1@603.82,465.08 ccw(c635.38,496.64) 635.38,452 ; R10.2@604.27,410.82 ccw(c583.54,431.55) 612.86,431.55 ; R10.2@604.72,411 ccw(c604.72,435.44) 622,418.16 ; R10.2@605.17,409.93 cw(c636,380.11) 636,423 ; R10.2@612.86,411.72 612.86,423 ; R10.2@614.22,410.37 626.84,423 636,423 ; 614.22,435.37 Q4.1@675.92,435.37 ; 635.99,435.37 ccw(c635.99,474.56) Q4.1@663.7,446.85 ; 641.96,452 cw(c641.96,421.25) Q4.1@663.7,442.99 ; Q4.1@662.92,436.12 cw(c636,457.17) 636,423 ; Q4.1@663.55,423 636,423 ; Q4.1@668.55,452 637,452 ; 408.37,474.37 431.37,474.37 ; 431.37,450.63 431.37,474.37 ; 612.86,423 636,423 ; 612.86,423 612.86,452 ; 612.86,452 637,452 ; 612.86,452 612.86,464.63 625.49,452 ; C14.1@613.91,464.96 ccw(c637,479.05) 637,452 ; C14.1@613.91,464.96 ccw(c637,479.05) 637,452 ; C14.1@613.91,464.96 ccw(c637,479.05) 637,452 ; C14.1@613.91,464.96 ccw(c637,479.05) 637,452 ; C14.1@613.91,464.96 ccw(c637,479.05) 637,452 ; C14.1@613.91,464.96 ccw(c637,479.05) 637,452 ; R10.2@615.29,410.09 cw(c636,399.93) 636,423 ; R10.2@615.29,410.09 cw(c636,399.93) 636,423 ; R10.2@615.29,410.09 cw(c636,399.93) 636,423 ; R10.2@615.29,410.09 cw(c636,399.93) 636,423 ; 625.49,452 637,452 ; 625.49,452 637,452 ; v1@395.35,469.65 cw(c406.76,458.24) 406.76,474.37 ccw(c406.76,458.24) v1@395.35,469.65 ; 639.89,423 ccw(c639.89,470.82) 673.7,437.01 cw(c639.89,470.82) 639.89,423 ; 645.99,435.37 ccw(c645.99,474.56) 673.7,446.85 cw(c645.99,474.56) 645.99,435.37 ; Q4.1@651.96,452 cw(c651.96,421.25) 673.7,442.99 ccw(c651.96,421.25) Q4.1@651.96,452
  Bottom Layer w25: Q4.1@668,455 695.55,455 ; Q4.1@675.61,454.95 ccw(c685.55,465) 695.55,455 ; Q4.1@675.63,435.24 ccw(c702.76,462.37) 702.76,424 ; Q4.1@675.63,444.76 cw(c700.35,420.05) 700.35,455 ; Q4.1@675.63,445.08 ccw(c690.31,459.76) 690.31,439 ; Q4.1@676.39,434.35 ccw(c696.55,448.82) 696.55,424 ; Q4.1@681.55,439 740,439 ; Q4.1@686.78,433.78 696.55,424 ; 695.55,455 ccw(c695.55,430.7) 676.26,445.47 cw(c695.55,430.7) 695.55,455 ; 695.55,455 v1(740,455) 740,439 ; 695.55,455 680.55,440 696.55,424 ; 696.55,424 v1(740,424) 740,439 ; 706.2,439 ccw(c706.2,488.8) v1@741.41,453.59 ; 706.2,439 ccw(c706.2,488.8) v1@741.41,453.59 ; 706.2,439 ccw(c706.2,488.8) v1@741.41,453.59 ; 708.62,439 cw(c708.62,392.62) v1@741.41,425.41 ; 708.62,439 cw(c708.62,392.62) v1@741.41,425.41 ; 708.62,439 cw(c708.62,392.62) v1@741.41,425.41 ; Q4.1@672.41,423.22 cw(c681.52,389.13) 706.47,414.08 ccw(c681.52,389.13) Q4.1@672.41,423.22 ; Q4.1@685.63,435.24 ccw(c712.76,462.37) 712.76,424 cw(c712.76,462.37) Q4.1@685.63,435.24 ; Q4.1@685.63,444.76 cw(c710.35,420.05) 710.35,455 ccw(c710.35,420.05) Q4.1@685.63,444.76 ; Q4.1@685.63,445.08 ccw(c700.31,459.76) 700.31,439 cw(c700.31,459.76) Q4.1@685.63,445.08
  other v1: 423,468 395,470
NetC15_1: C15.1 D8.1 Q5.1 R11.1 R12.2 | length 3142.5
  Top Layer w20: 973.82,819.92 cw(c985.18,808.56) 985.18,824.63 ; 979,824.63 1008,824.63 ; R12.2@985,859 v1(985,910) 985,905 998,892 ; v1@985,892 974.22,881.21 974.22,872.21 ; 988,831 989.37,832.37 989.37,854.63 ; 998.13,863.39 998.13,869.87 v1(985,883) ; 999.37,890.63 998,892 ; 1003.1,829.6 cw(c1031.75,800.94) Q5.1@1043.55,839.71 ; 1010,834 989.37,854.63 ; D8.1@1012,878 998,892 ; 1012.26,820.37 1012.63,820 ; 1015,832 1020,837 D8.1@1020,878 ; 1019.03,826.48 cw(c1033.89,811.62) 1046.97,828.08 1046.97,851.03 ; Q5.1@1035.92,824.63 1008,824.63 ; Q5.1@1036,807 1029.37,800.37 C15.1@972.86,800.37 ; Q5.1@1037.85,845.3 1028.51,854.63 R12.2@974.22,854.63 ; C15.1@972.86,800.37 992.49,820 Q5.1@1040.55,820 ; C15.1@972.86,800.37 974.22,801.72 R12.2@974.22,854.63 ; R12.2@974.22,854.63 cw(c974.22,783.26) 1032.63,824.28 ccw(c974.22,783.26) R12.2@974.22,854.63 ; R12.2@974.22,854.63 974.22,872.21 ; R12.2@974.22,854.63 989.37,854.63 ; 974.22,867.75 cw(c989.66,867.75) v1@985.15,882.52 ; 974.22,867.75 cw(c989.66,867.75) v1@985.15,882.52 ; 974.22,867.75 cw(c989.66,867.75) v1@985.15,882.52 ; 974.22,867.75 cw(c989.66,867.75) v1@985.15,882.52 ; 974.22,872.21 v1(985,883) ; v1(985,883) ccw(c1008.97,859.03) 975.34,854.71 cw(c1008.97,859.03) v1(985,883) ; 989.37,854.63 1012.74,878 D8.1@1020,878 ; 1008,824.63 cw(c1008,790.15) Q5.1@1033.41,813.45 ; 1008,824.63 cw(c1008,790.15) Q5.1@1033.41,813.45 ; 1008,824.63 cw(c1008,790.15) Q5.1@1033.41,813.45 ; 1008,824.63 cw(c1008,790.15) Q5.1@1033.41,813.45 ; 1008,824.63 cw(c1008,790.15) Q5.1@1033.41,813.45 ; 1008,824.63 cw(c1008,790.15) Q5.1@1033.41,813.45 ; 1008,824.63 1017.18,824.63 ; 1008,824.63 1012.63,820 ; 1012.63,820 Q5.1@1040.55,820 ; 1012.63,820 Q5.1@1040.55,820 ; 1017.17,820 cw(c1017.17,796.62) Q5.1@1033.7,813.15 ; 1017.17,820 ccw(c1017.17,843.38) Q5.1@1033.7,826.85 ; 1017.17,820 cw(c1017.17,796.62) Q5.1@1033.7,813.15 ; 1017.17,820 ccw(c1017.17,843.38) Q5.1@1033.7,826.85 ; 1017.17,820 cw(c1017.17,796.62) Q5.1@1033.7,813.15 ; 1017.17,820 ccw(c1017.17,843.38) Q5.1@1033.7,826.85 ; 1017.17,820 cw(c1017.17,796.62) Q5.1@1033.7,813.15 ; 1017.17,820 ccw(c1017.17,843.38) Q5.1@1033.7,826.85 ; 1017.17,820 cw(c1017.17,796.62) Q5.1@1033.7,813.15 ; 1017.17,820 ccw(c1017.17,843.38) Q5.1@1033.7,826.85 ; 1017.17,820 cw(c1017.17,796.62) Q5.1@1033.7,813.15 ; 1017.17,820 ccw(c1017.17,843.38) Q5.1@1033.7,826.85 ; 1017.17,820 ccw(c1017.17,843.38) Q5.1@1033.7,826.85 ; 1017.17,820 cw(c1017.17,796.62) Q5.1@1033.7,813.15 ; 1017.17,820 ccw(c1017.17,843.38) Q5.1@1033.7,826.85 ; 1017.17,820 cw(c1017.17,796.62) Q5.1@1033.7,813.15 ; 1017.18,824.63 cw(c1017.18,808.08) Q5.1@1031.92,815.6 ; 1017.18,824.63 cw(c1017.18,808.08) Q5.1@1031.92,815.6 ; 1017.18,824.63 cw(c1017.18,808.08) Q5.1@1031.92,815.6 ; D8.1@1020,878 ccw(c1063.78,878) 1044.76,838.57 cw(c1063.78,878) D8.1@1020,878 ; D8.1@1020,878 1046.97,851.03 ; Q5.1@1033.7,813.15 ccw(c1016.28,795.73) 1016.28,820.37 cw(c1016.28,795.73) Q5.1@1033.7,813.15 ; Q5.1@1033.7,826.85 cw(c1018.06,842.49) 1018.06,820.37 ccw(c1018.06,842.49) Q5.1@1033.7,826.85 ; 1046.97,851.03 cw(c1034.66,851.03) 1037.96,839.17 ccw(c1034.66,851.03) 1046.97,851.03 ; R12.2@974.22,855.76 cw(c1012.24,855.76) 985.35,882.65 ccw(c1012.24,855.76) R12.2@974.22,855.76 ; R12.2@974.27,855.08 ccw(c948.38,880.97) 985,880.97 cw(c948.38,880.97) R12.2@974.27,855.08 ; R12.2@974.4,854.09 cw(c959.13,827.98) 989.37,827.98 ccw(c959.13,827.98) R12.2@974.4,854.09 ; R12.2@974.72,854 cw(c974.72,817.11) 1000.8,843.2 ccw(c974.72,817.11) R12.2@974.72,854 ; R12.2@974.72,855.26 ccw(c974.72,892.15) 1000.8,866.06 cw(c974.72,892.15) R12.2@974.72,855.26 ; R12.2@974.84,854.01 cw(c979.45,830.06) 996.69,847.31 ccw(c979.45,830.06) R12.2@974.84,854.01 ; v1@983.22,890.22 ccw(c972.67,900.76) 984.6,909.7 cw(c972.67,900.76) v1@983.22,890.22 ; v1@984.75,882.57 cw(c971.39,859.4) 998.13,859.4 ccw(c971.39,859.4) v1@984.75,882.57 ; v1@984.85,882.52 cw(c979.17,864.43) 998.13,864.43 ccw(c979.17,864.43) v1@984.85,882.52 ; v1@985.3,882.6 cw(c996.23,868.23) 1009,881 ccw(c996.23,868.23) v1@985.3,882.6 ; 993.54,800.37 ccw(c993.54,857.17) 1033.7,817.01 cw(c993.54,857.17) 993.54,800.37 ; 1003.25,886.75 ccw(c1018.47,901.97) 1020,880.5 cw(c1018.47,901.97) 1003.25,886.75 ; 1003.34,868.6 cw(c1020,851.94) 1020,875.5 ccw(c1020,851.94) 1003.34,868.6 ; 1012.7,854.63 cw(c1012.7,810.29) 1048.99,835.77 ccw(c1012.7,810.29) 1012.7,854.63 ; 1018.6,835.6 cw(c1034.17,820.03) 1046.17,838.49 ccw(c1034.17,820.03) 1018.6,835.6 ; 1020,846.14 ccw(c1048.41,846.14) 1036.07,820.55 cw(c1048.41,846.14) 1020,846.14 ; 1022.14,861 cw(c999.15,838.01) 1031.05,831.72 ccw(c999.15,838.01) 1022.14,861 ; 1039.18,858.82 cw(c1010.93,830.58) 1050.86,829.59 ccw(c1010.93,830.58) 1039.18,858.82
  Bottom Layer w20: R11.1@967.86,948.63 985,931.49 v1@985,886 ; R11.1@967.92,948.18 cw(c926.7,906.96) 985,906.96 ccw(c926.7,906.96) R11.1@967.92,948.18 ; R11.1@968.17,948.03 cw(c960.48,924.75) 985,924.75 ccw(c960.48,924.75) R11.1@968.17,948.03
NetC16_1: C16.1 Q6.1 R13.1 R14.2 R78.1 | length 1458
  Top Layer w22: R13.1@784,428.5 v2(784,460)
  Mid-Layer 1 w22: v2@783.65,465.35 cw(c804.52,444.48) 804.52,474 ; v2@784,465 793,474 861,474 895,440 1069,440 1105,404 v2(1110,404) ; v2@785.06,458.94 cw(c821.42,422.58) 821.42,474 ccw(c821.42,422.58) v2@785.06,458.94 ; v2@785.5,460 cw(c801.19,460) 790.1,471.1 ccw(c801.19,460) v2@785.5,460 ; 1098.9,410.1 ccw(c1110,421.19) 1110,405.5 cw(c1110,421.19) 1098.9,410.1
  Bottom Layer w15: R14.2@954.22,395.37 973,414.15 ; 973,436 973,414.15 ; 991,432.15 973,414.15
  Bottom Layer w20: R14.2@954.22,395.37 954.22,407.22 977,430 977,435.37 Q6.1@1035.92,435.37 ; 973,425 972.86,425.13 C16.1@972.86,449.63 Q6.1@1030.63,449.63 ; C16.1@973.82,440.08 ccw(c985.18,451.44) 985.18,435.37 ; Q6.1@1040.55,440 1071,440 1107,404 v2(1110,404) ; C16.1@972.92,449.18 cw(c963.09,439.35) C16.1@977,439.35 ; C16.1@972.92,449.18 cw(c963.09,439.35) C16.1@977,439.35 ; C16.1@972.92,449.18 cw(c963.09,439.35) C16.1@977,439.35 ; C16.1@972.92,449.18 cw(c963.09,439.35) C16.1@977,439.35 ; 1005.99,435.37 ccw(c1005.99,474.56) Q6.1@1033.7,446.85 ; 1005.99,435.37 ccw(c1005.99,474.56) Q6.1@1033.7,446.85 ; 1005.99,435.37 ccw(c1005.99,474.56) Q6.1@1033.7,446.85 ; Q6.1@1047.4,433.15 cw(c1063.93,416.62) 1063.93,440 ; Q6.1@1047.4,433.15 cw(c1063.93,416.62) 1063.93,440 ; Q6.1@1047.4,433.15 cw(c1063.93,416.62) 1063.93,440 ; Q6.1@1047.4,446.85 ccw(c1063.93,463.38) 1063.93,440 ; Q6.1@1047.4,446.85 ccw(c1063.93,463.38) 1063.93,440 ; Q6.1@1047.4,446.85 ccw(c1063.93,463.38) 1063.93,440 ; R14.2@955.35,395.37 cw(c986.69,395.37) 964.53,417.53 ccw(c986.69,395.37) R14.2@955.35,395.37 ; 966.35,419.35 ccw(c947.42,438.28) 971.79,449.37 cw(c947.42,438.28) 966.35,419.35 ; C16.1@973.82,450.08 ccw(c1009.32,485.58) 1009.32,435.37 cw(c1009.32,485.58) C16.1@973.82,450.08 ; 1016.66,449.63 ccw(c1016.66,473.74) 1033.7,456.69 cw(c1016.66,473.74) 1016.66,449.63 ; 1017.68,449.63 cw(c1017.68,426.97) 1033.7,442.99 ccw(c1017.68,426.97) 1017.68,449.63
  Bottom Layer w22: R78.1@784,419.87 v2(784,460)
NetC77_2: C77.2 R63.1 | length 41
  Bottom Layer w50: C77.2@394,671 394,712
NetC78_2: C78.2 R64.1 | length 53
  Bottom Layer w45: C78.2@770,669 R64.1@770,722
NetC79_1: C79.1 R65.2 | length 296.6
  Bottom Layer w40: C79.1@1150,618 1173,595 ; C79.1@1150,626.85 1173,603.85 ; R65.2@1159,559 1159,605.42 ; 1160.07,607.07 cw(c1128.84,575.85) 1173,575.85 ; R65.2@1173,557 1173,595 ; 1173,603.42 1173,595 ; C79.1@1160.07,627.07 cw(c1128.84,595.85) 1173,595.85 ; C79.1@1160.07,627.07 cw(c1128.84,595.85) 1173,595.85 ; C79.1@1160.07,627.07 cw(c1128.84,595.85) 1173,595.85
NetD1_1: D1.1 R16.1 | length 72.5
  Top Layer w25: D1.1@320,110 R16.1@392.5,110
NetD2_1: D2.1 R17.1 | length 669.8
  Top Layer w15: R17.1@756.5,100 711,100 D2.1@699,88 741.5,88 ; R17.1@762.5,95 755.5,88 741.5,88 ; D2.1@701.55,94.17 cw(c715.64,80.08) D2.1@715.64,100 ; D2.1@701.55,94.17 cw(c715.64,80.08) D2.1@715.64,100 ; D2.1@701.55,94.17 cw(c715.64,80.08) D2.1@715.64,100 ; D2.1@712.16,83.56 cw(c751.85,43.87) R17.1@751.85,100 ; D2.1@712.16,83.56 cw(c722.88,72.84) 722.88,88 ; D2.1@712.16,83.56 cw(c751.85,43.87) R17.1@751.85,100 ; D2.1@712.16,83.56 cw(c722.88,72.84) 722.88,88 ; D2.1@712.16,83.56 cw(c722.88,72.84) 722.88,88 ; D2.1@712.16,83.56 cw(c751.85,43.87) R17.1@751.85,100 ; D2.1@712.16,92.44 ccw(c722.88,103.16) 722.88,88 ; D2.1@712.16,92.44 ccw(c722.88,103.16) 722.88,88 ; D2.1@712.16,92.44 ccw(c722.88,103.16) 722.88,88 ; 727.49,88 ccw(c727.49,130.01) R17.1@757.2,100.3 ; 727.49,88 ccw(c727.49,130.01) R17.1@757.2,100.3 ; 727.49,88 ccw(c727.49,130.01) R17.1@757.2,100.3 ; 732.32,100 cw(c732.32,64.82) R17.1@757.2,89.7 ; 732.32,100 cw(c732.32,64.82) R17.1@757.2,89.7 ; 732.32,100 cw(c732.32,64.82) R17.1@757.2,89.7 ; 741.5,88 ccw(c741.5,102.96) R17.1@755.49,97.66 ; 741.5,88 ccw(c741.5,102.96) R17.1@755.49,97.66 ; 741.5,88 ccw(c741.5,102.96) R17.1@755.49,97.66 ; 741.5,88 ccw(c741.5,102.96) R17.1@755.49,97.66 ; 741.5,88 ccw(c741.5,102.96) R17.1@755.49,97.66 ; 741.5,88 ccw(c741.5,102.96) R17.1@755.49,97.66
NetD3_1: D3.1 R18.1 | length 182.8
  Top Layer w20: D3.1@1073,66 R18.1@1145.5,66 ; D3.1@1091.39,72.67 ccw(c1107.5,88.78) 1107.5,66 ; D3.1@1091.39,72.67 ccw(c1107.5,88.78) 1107.5,66 ; D3.1@1091.39,72.67 ccw(c1107.5,88.78) 1107.5,66 ; 1129.48,66 cw(c1129.48,41.98) R18.1@1146.46,58.96 ; 1129.48,66 cw(c1129.48,41.98) R18.1@1146.46,58.96 ; 1129.48,66 cw(c1129.48,41.98) R18.1@1146.46,58.96
NetD4_2: D4.2 R73.1 | length 367.7
  Top Layer w20: 286,962 265.37,941.37 R73.1@247.86,941.37 251.37,941.37 267,957 ; 267,957 ccw(c267,938.83) 248.99,941.28 cw(c267,938.83) 267,957 ; 267,957 272,962 D4.2@310,962 305,957 267,957 ; R73.1@248.37,942 ccw(c248.37,984.56) 278.47,954.47 cw(c248.37,984.56) R73.1@248.37,942 ; R73.1@248.82,940.92 cw(c287.63,902.11) 287.63,957 ccw(c287.63,902.11) R73.1@248.82,940.92
NetD5_2: D5.2 R74.1 | length 123.8
  Bottom Layer w25: R74.1@243.3,390.5 cw(c244.93,348.2) 274.87,378.13 ; R74.1@243.37,390.5 cw(c243.37,344.32) 276.03,376.97 ; R74.1@248,388.63 264.37,388.63 D5.2@290,363
NetD6_2: D6.2 R75.1 | length 74.1
  Top Layer w20: R75.1@613.49,957 D6.2@655,957 ; R75.1@608.82,950.92 cw(c623.48,936.26) 623.48,957 ccw(c623.48,936.26) R75.1@608.82,950.92
NetD7_1: D7.1 R76.2 | length 80
  Bottom Layer w20: R76.2@421.37,402.65 cw(c421.37,375.77) 440.38,394.78 ; R76.2@431.37,403.78 D7.1@473,362.17
NetD8_2: D8.2 R77.1 | length 237.1
  Top Layer w20: R77.1@967.86,951.37 978.37,951.37 987,960 ; R77.1@972.49,960 987,960 ; D8.2@1014,960 987,960 ; R77.1@968.87,950.99 cw(c987,937.26) 987,960 ; R77.1@968.87,950.99 cw(c987,937.26) 987,960 ; R77.1@968.87,950.99 cw(c987,937.26) 987,960 ; R77.1@968.87,950.99 cw(c987,937.26) 987,960 ; R77.1@968.37,952 ccw(c968.37,977.66) 986.52,959.52 cw(c968.37,977.66) R77.1@968.37,952 ; R77.1@968.82,950.92 cw(c990.73,929.01) 990.73,960 ccw(c990.73,929.01) R77.1@968.82,950.92
NetD9_1: D9.1 R78.2 | length 78.7
  Bottom Layer w20: R78.2@781.37,383.78 781.37,336.63 D9.1@788,330 ; D9.1@781.37,339.97 ccw(c795.47,339.97) 785.5,330 cw(c795.47,339.97) D9.1@781.37,339.97
NetR19_2: R19.2 U7.26 | length 194
  Bottom Layer w12: R19.2@1259,449 1276,466 1301,466 1340,505 U7.26@1340,539.53 ; R19.2@1249.63,449.35 ccw(c1249.63,472.82) 1266.22,456.22 ; R19.2@1249.63,449.35 ccw(c1249.63,472.82) 1266.22,456.22 ; R19.2@1249.63,449.35 ccw(c1249.63,472.82) 1266.22,456.22
NetR20_2: R20.2 U7.25 | length 190.2
  Bottom Layer w12: R20.2@1310.5,437.5 1365,492 U7.25@1365,539.53 ; R20.2@1319.26,434.72 cw(c1347.12,434.72) 1327.42,454.42 ; R20.2@1319.26,434.72 cw(c1347.12,434.72) 1327.42,454.42 ; R20.2@1319.26,434.72 cw(c1347.12,434.72) 1327.42,454.42
NetR41_1: R41.1 R42.2 | length 729
  Top Layer w25: R42.2@1224.15,758.2 R41.1@1150.72,758.2 1164.2,758.2 1175.77,769.77 R42.2@1235.72,769.77 ; R41.1@1164.49,750.33 cw(c1183.48,731.35) 1183.48,758.2 ; R41.1@1164.49,750.33 cw(c1211.42,703.4) R42.2@1211.42,769.77 ; R41.1@1164.49,750.33 cw(c1183.48,731.35) 1183.48,758.2 ; R41.1@1164.49,750.33 cw(c1211.42,703.4) R42.2@1211.42,769.77 ; R41.1@1164.49,750.33 cw(c1211.42,703.4) R42.2@1211.42,769.77 ; R41.1@1164.49,750.33 cw(c1183.48,731.35) 1183.48,758.2 ; R41.1@1164.49,766.06 ccw(c1183.48,785.05) 1183.48,758.2 ; R41.1@1164.49,766.06 ccw(c1183.48,785.05) 1183.48,758.2 ; R41.1@1164.49,766.06 ccw(c1183.48,785.05) 1183.48,758.2 ; R41.1@1175.02,758.2 ccw(c1175.02,824.57) R42.2@1221.95,777.64 ; R41.1@1175.02,758.2 ccw(c1175.02,824.57) R42.2@1221.95,777.64 ; R41.1@1175.02,758.2 ccw(c1175.02,824.57) R42.2@1221.95,777.64 ; 1202.97,769.77 cw(c1202.97,742.92) R42.2@1221.95,761.91 ; 1202.97,769.77 ccw(c1202.97,796.62) R42.2@1221.95,777.64 ; 1202.97,769.77 cw(c1202.97,742.92) R42.2@1221.95,761.91 ; 1202.97,769.77 ccw(c1202.97,796.62) R42.2@1221.95,777.64 ; 1202.97,769.77 ccw(c1202.97,796.62) R42.2@1221.95,777.64 ; 1202.97,769.77 cw(c1202.97,742.92) R42.2@1221.95,761.91
NetRP1_1: RP1.1 U7.24 | length 175
  Bottom Layer w10: U7.24@1390,539.53 1390,474.9 RP1.1@1398.84,466.06 ; 1390,493.62 ccw(c1422.37,493.62) RP1.1@1399.48,470.73 ; 1390,493.62 ccw(c1422.37,493.62) RP1.1@1399.48,470.73 ; 1390,493.62 ccw(c1422.37,493.62) RP1.1@1399.48,470.73 ; 1392.02,472.88 ccw(c1397.05,477.91) RP1.1@1398.64,470.98 ; 1392.02,472.88 ccw(c1397.05,477.91) RP1.1@1398.64,470.98 ; 1392.02,472.88 ccw(c1397.05,477.91) RP1.1@1398.64,470.98